# EAGLE board AVRI2CIO_V0_2_LEVEL1 (EAGLE 6.5.0)
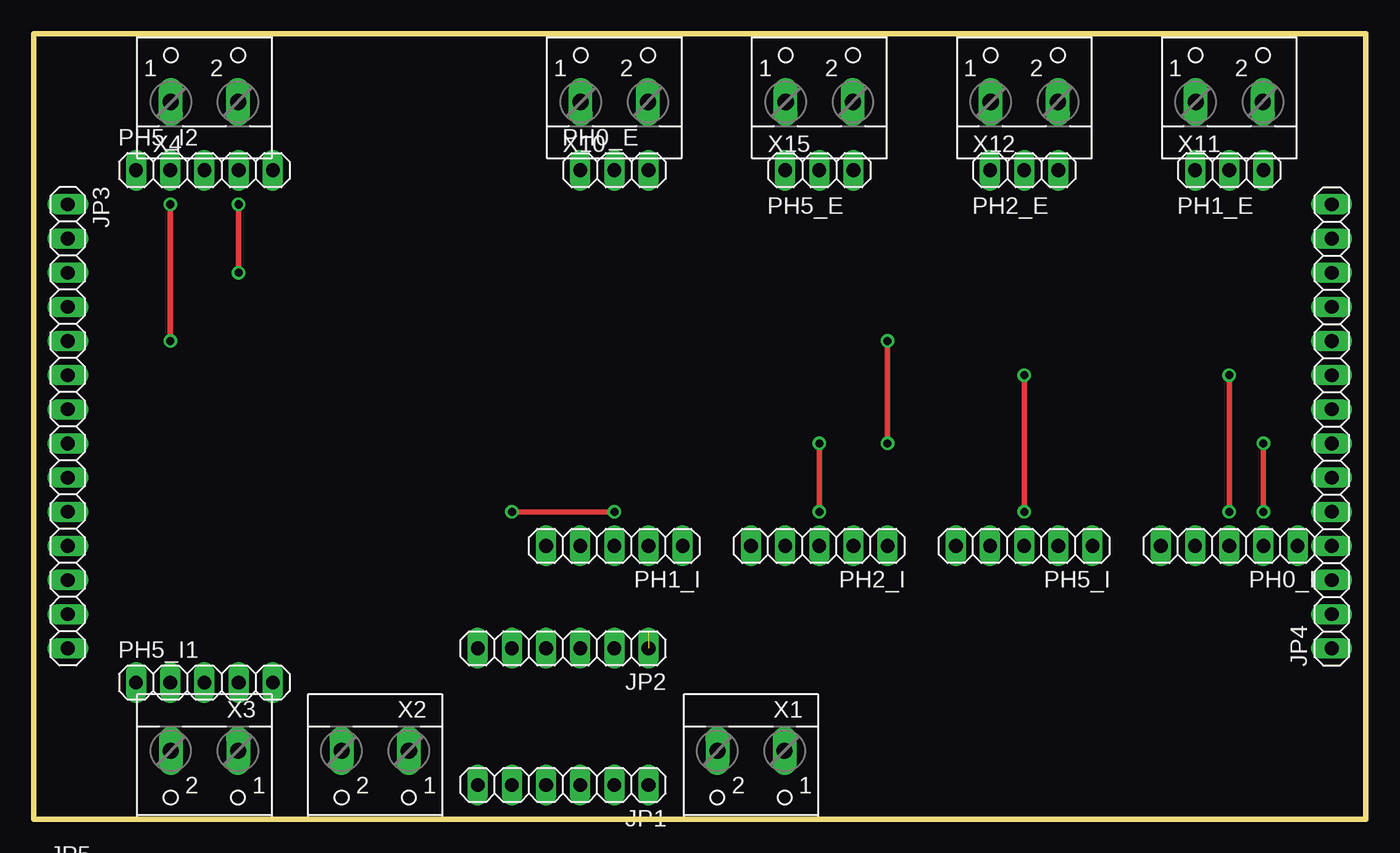
[diagram p0: board, top side]
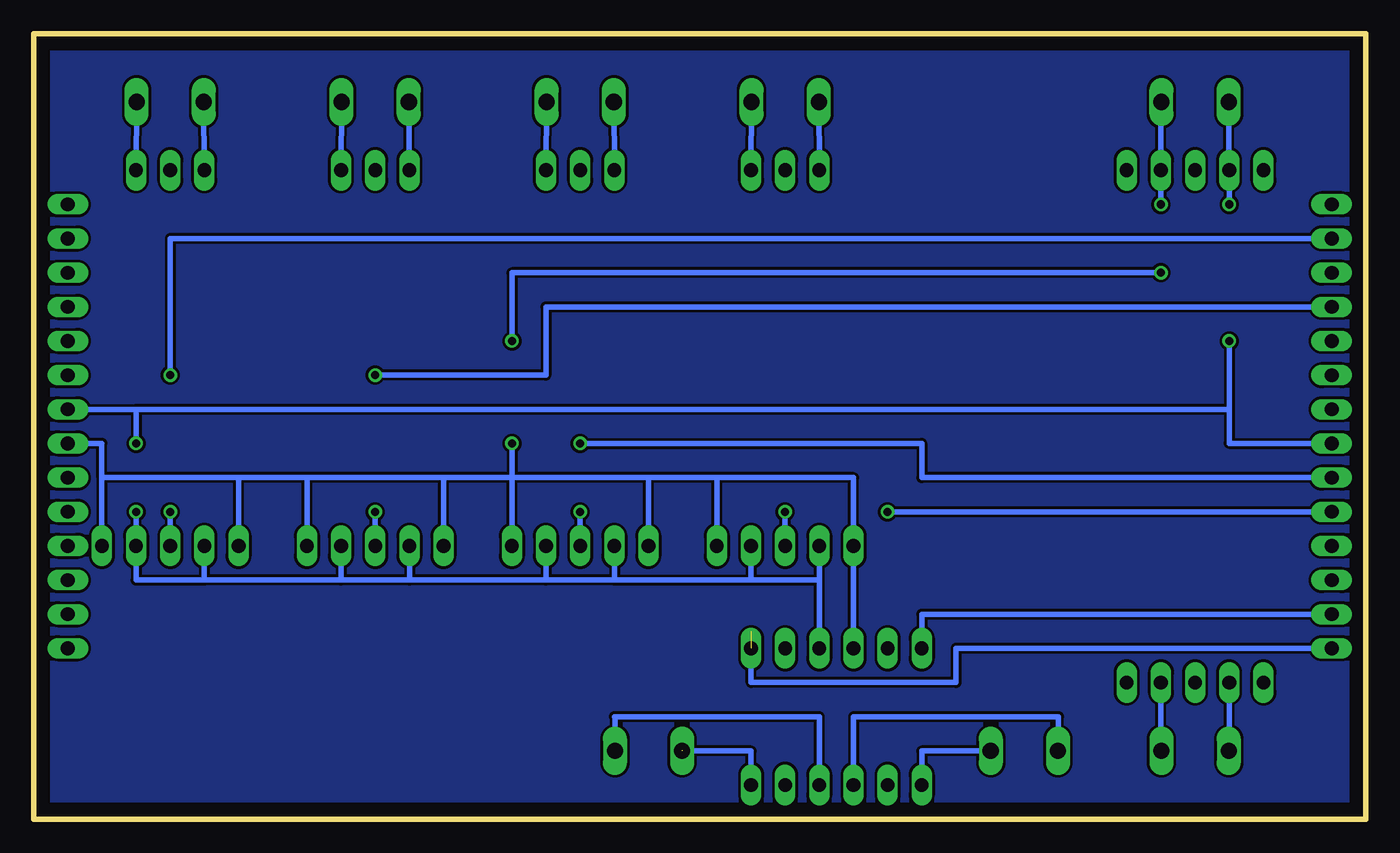
[diagram p1: board, bottom side, seen from below]

Size 99.06 x 58.42 mm. Coordinates in mm from the lower left corner, seen from the top.
Outline: 0,0 99.06,0 99.06,58.42 0,58.42 0,0
Copper layers (1*16): Top 0.035mm / dielectric 1.5mm / Bottom 0.035mm
Design rules "default": minimum track width 10mil, minimum drill 24mil, track to track 8mil, track to pad 8mil, pad to pad 8mil, via to via 8mil, smd to smd 8mil, copper to edge 40mil, drill to drill 8mil, minimum pad ring 10mil, minimum via ring 8mil, stop-mask expansion 4mil, vias tented up to drill 0mil, thermal gap 10mil

## Footprints (pad centres in the part's own frame; a part is rotated, then mirrored left to right if it is on the bottom)
1X06 = drill 1.016 long: 1 -6.35,0; 2 -3.81,0; 3 -1.27,0; 4 1.27,0; 5 3.81,0; 6 6.35,0
1X14 = drill 1.016 long: 1 -16.51,0; 2 -13.97,0; 3 -11.43,0; 4 -8.89,0; 5 -6.35,0; 6 -3.81,0; 7 -1.27,0; 8 1.27,0; 9 3.81,0; 10 6.35,0; 11 8.89,0; 12 11.43,0; 13 13.97,0; 14 16.51,0
1X01 = drill 1.016 octagon: 1 0,0
1X03 = drill 1.016 long: 1 -2.54,0; 2 0,0; 3 2.54,0
1X05 = drill 1.016 long: 1 -5.08,0; 2 -2.54,0; 3 0,0; 4 2.54,0; 5 5.08,0
W237-102 = drill 1.194 long: 1 -2.5,-1.27; 2 2.5,-1.27

## Placement (x,y rotation side)
JP1  I2C  [1X06]  39.37,2.54 180 top
JP2  [1X06]  39.37,12.7 180 top
JP3  [1X14]  2.54,29.21 270 top
JP4  [1X14]  96.52,29.21 90 top
JP5  [1X01]  2.54,-5.08 0 top  (outside the outline)
PH0_E  [1X03]  43.18,48.26 0 top
PH0_I  [1X05]  88.9,20.32 180 top
PH1_E  [1X03]  88.9,48.26 0 top
PH1_I  [1X05]  43.18,20.32 180 top
PH2_E  [1X03]  73.66,48.26 0 top
PH2_I  [1X05]  58.42,20.32 180 top
PH5_E  [1X03]  58.42,48.26 0 top
PH5_I  [1X05]  73.66,20.32 180 top
PH5_I1  [1X05]  12.7,10.16 0 top
PH5_I2  [1X05]  12.7,48.26 0 top
X1  [W237-102]  53.34,3.81 180 top
X2  [W237-102]  25.4,3.81 180 top
X3  [W237-102]  12.7,3.81 180 top
X4  [W237-102]  12.7,54.61 0 top
X10  [W237-102]  43.18,54.61 0 top
X11  [W237-102]  88.9,54.61 0 top
X12  [W237-102]  73.66,54.61 0 top
X15  [W237-102]  58.42,54.61 0 top

## Library data of the parts
JP1-JP5 PH0_E PH0_I PH1_E PH1_I PH2_E PH2_I PH5_E PH5_I PH5_I1 PH5_I2 = pinhead
X1-X4 X10-X12 X15 = con-wago-500; MPN: 237-102; OC_FARNELL: unknown; OC_NEWARK: 70K9898

## Nets
+5V: JP2.4 JP4.7 PH0_I.1 PH0_I.5 PH1_I.1 PH1_I.5 PH2_I.1 PH2_I.5 PH5_I2.4 PH5_I.1 PH5_I.5 X4.2
GND: JP2.3 JP3.8 JP4.8 PH0_I.2 PH0_I.4 PH1_I.2 PH1_I.4 PH2_I.2 PH2_I.4 PH5_I2.2 PH5_I.2 PH5_I.4 X4.1
N$1: PH0_E.3 X10.2
N$2: PH0_E.1 X10.1
N$5: JP3.10 PH1_I.3
N$6: JP3.9 PH2_I.3
N$7: JP1.1 X1.2
N$8: JP1.3 X1.1
N$9: JP1.4 X2.2
N$10: JP1.6 X2.1
N$11: JP2.1 JP3.14
N$12: JP2.6 JP3.13
N$14: PH5_I1.2 X3.2
N$16: PH5_I1.4 X3.1
N$18: JP3.2 PH0_I.3
N$19: PH1_E.1 X11.1
N$20: PH1_E.3 X11.2
N$22: JP3.4 PH5_I.3
N$23: PH2_E.1 X12.1
N$24: PH2_E.3 X12.2
N$29: PH5_E.1 X15.1
N$30: PH5_E.3 X15.2

## Tracks (layer width: path | path; a pad name or v marks a point on that pad's centre or on a via)
+5V  (via drill 0.6)
  Top 0.406: v63.5,35.56 v63.5,27.94 | v15.24,40.64 v15.24,45.72
  Bottom 0.406: JP2.4 PH1_I.5 38.1,25.4 48.26,25.4 | 48.26,25.4 53.34,25.4 | 53.34,25.4 63.5,25.4 | 63.5,25.4 68.58,25.4 | 68.58,25.4 78.74,25.4 | 78.74,25.4 83.82,25.4 | 83.82,25.4 93.98,25.4 | 93.98,25.4 PH0_I.1 | 93.98,25.4 93.98,27.94 JP4.7 | PH0_I.5 83.82,25.4 | PH5_I.1 78.74,25.4 | PH5_I.5 68.58,25.4 | PH2_I.1 63.5,25.4 | PH2_I.5 53.34,25.4 | PH1_I.1 48.26,25.4 | v15.24,40.64 63.5,40.64 v63.5,35.56 | v63.5,27.94 63.5,25.4 | v15.24,45.72 PH5_I2.4 15.24,53.34 X4.2
GND  (via drill 0.6)
  Top 0.406: v91.44,22.86 v91.44,27.94 | v10.16,45.72 v10.16,35.56
  Bottom 0.406: 55.88,17.78 45.72,17.78 | PH2_I.4 55.88,17.78 | 55.88,17.78 60.96,17.78 | PH2_I.2 60.96,17.78 | 60.96,17.78 71.12,17.78 | PH5_I.4 71.12,17.78 | 71.12,17.78 76.2,17.78 | PH5_I.2 76.2,17.78 | 76.2,17.78 86.36,17.78 | PH0_I.4 86.36,17.78 | v91.44,22.86 PH0_I.2 91.44,17.78 86.36,17.78 | JP4.8 91.44,30.48 | 91.44,30.48 v91.44,27.94 | PH1_I.2 45.72,17.78 | 45.72,17.78 40.64,17.78 | 40.64,17.78 PH1_I.4 | JP2.3 40.64,17.78 | 10.16,30.48 91.44,30.48 | 10.16,30.48 10.16,27.94 JP3.8 | X4.1 10.2,48.26 PH5_I2.2 v10.16,45.72 | v10.16,35.56 10.16,30.48
N$1
  Bottom 0.406: PH0_E.3 X10.2
N$2
  Bottom 0.406: PH0_E.1 X10.1
N$3
  pour Bottom: 0,0 99.06,0 99.06,2.54 99.06,58.42 0,58.42
N$5  (via drill 0.6)
  Top 0.406: v43.18,22.86 v35.56,22.86
  Bottom 0.406: PH1_I.3 v43.18,22.86 | JP3.10 v35.56,22.86
N$6  (via drill 0.6)
  Top 0.406: v58.42,22.86 v58.42,27.94
  Bottom 0.406: PH2_I.3 v58.42,22.86 | v58.42,27.94 33.02,27.94 33.02,25.4 JP3.9
N$7  (1 unrouted)
  Bottom 0.406: JP1.1 45.72,5.08 50.8,5.08
N$8
  Bottom 0.406: JP1.3 40.64,7.62 55.84,7.62 | 55.88,7.62 55.84,7.62 | 55.84,7.62 X1.1
N$9
  Bottom 0.406: X2.2 22.86,5.08 22.86,7.62 38.1,7.62 JP1.4
N$10
  Bottom 0.406: X2.1 33.02,5.08 JP1.6
N$11  (1 unrouted)
  Bottom 0.406: JP3.14 30.48,12.7 30.48,10.16 45.72,10.16 45.72,13.97
N$12
  Bottom 0.406: JP3.13 33.02,15.24 JP2.6
N$14
  Bottom 0.406: X3.2 10.16,5.08 PH5_I1.2
N$16
  Bottom 0.406: X3.1 15.24,5.08 PH5_I1.4
N$18  (via drill 0.6)
  Top 0.406: v88.9,33.02 v88.9,22.86
  Bottom 0.406: JP3.2 88.9,43.18 v88.9,33.02 | v88.9,22.86 PH0_I.3
N$19
  Bottom 0.406: PH1_E.1 X11.1
N$20
  Bottom 0.406: PH1_E.3 X11.2
N$22  (via drill 0.6)
  Top 0.406: v73.66,33.02 v73.66,22.86
  Bottom 0.406: JP3.4 60.96,38.1 60.96,33.02 v73.66,33.02 | PH5_I.3 v73.66,22.86
N$23
  Bottom 0.406: PH2_E.1 X12.1
N$24
  Bottom 0.406: PH2_E.3 X12.2
N$29
  Bottom 0.406: PH5_E.1 X15.1
N$30
  Bottom 0.406: PH5_E.3 X15.2